# Altium PCB Linelance_PCB v1.2.PcbDoc
Units mm, origin at the board's own origin, x right, y up, seen from the top; angles counter-clockwise.
Board outline 33 x 79.6 mm, 2 copper layers (Top Layer, Bottom Layer), stack 1.672 mm thick; 71 components, 56 nets, 261 pads, 43 vias.
Unrouted connection lines stored in the file: 2.
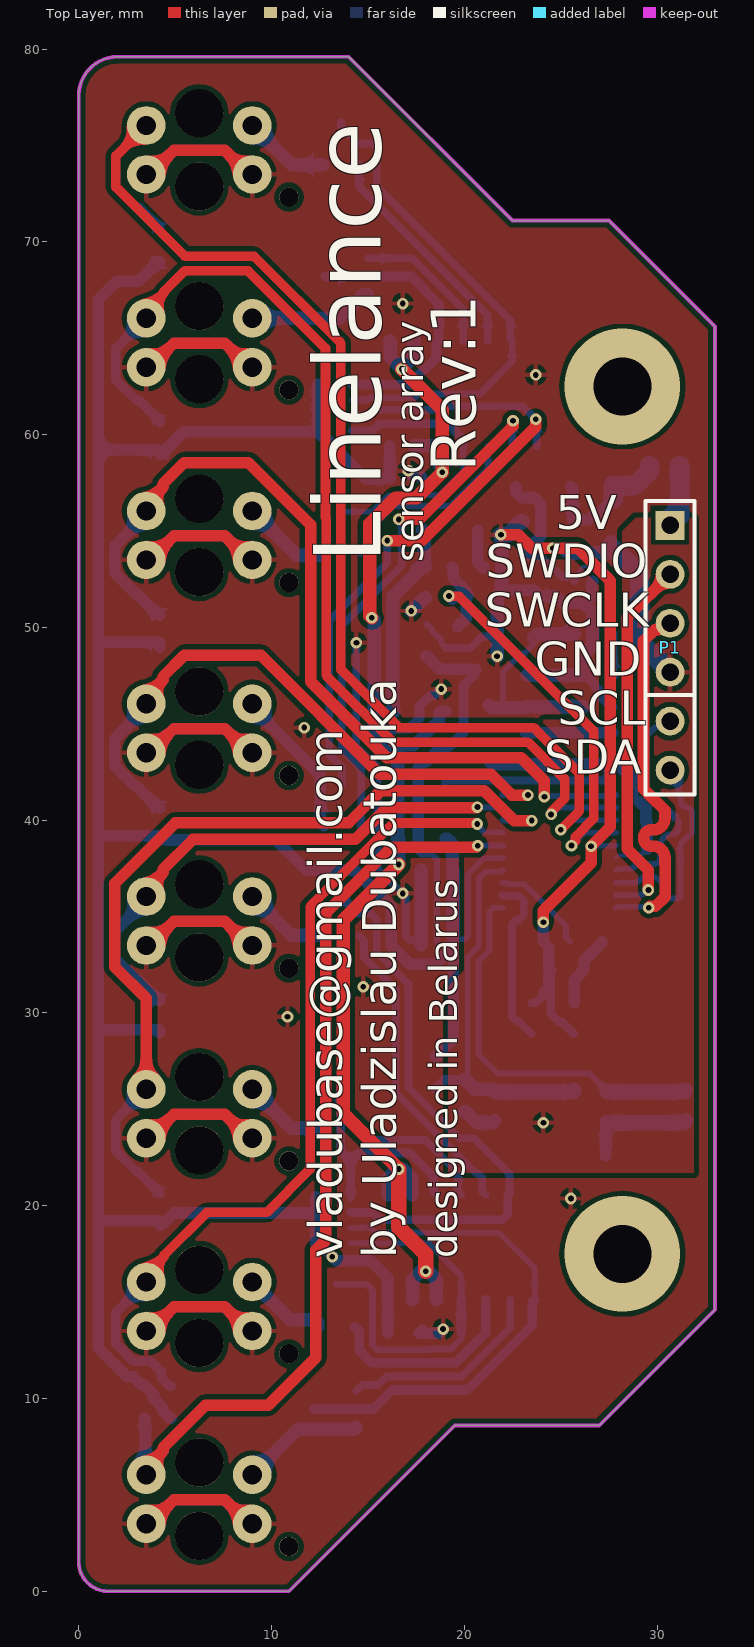
[diagram p0: Top Layer view]
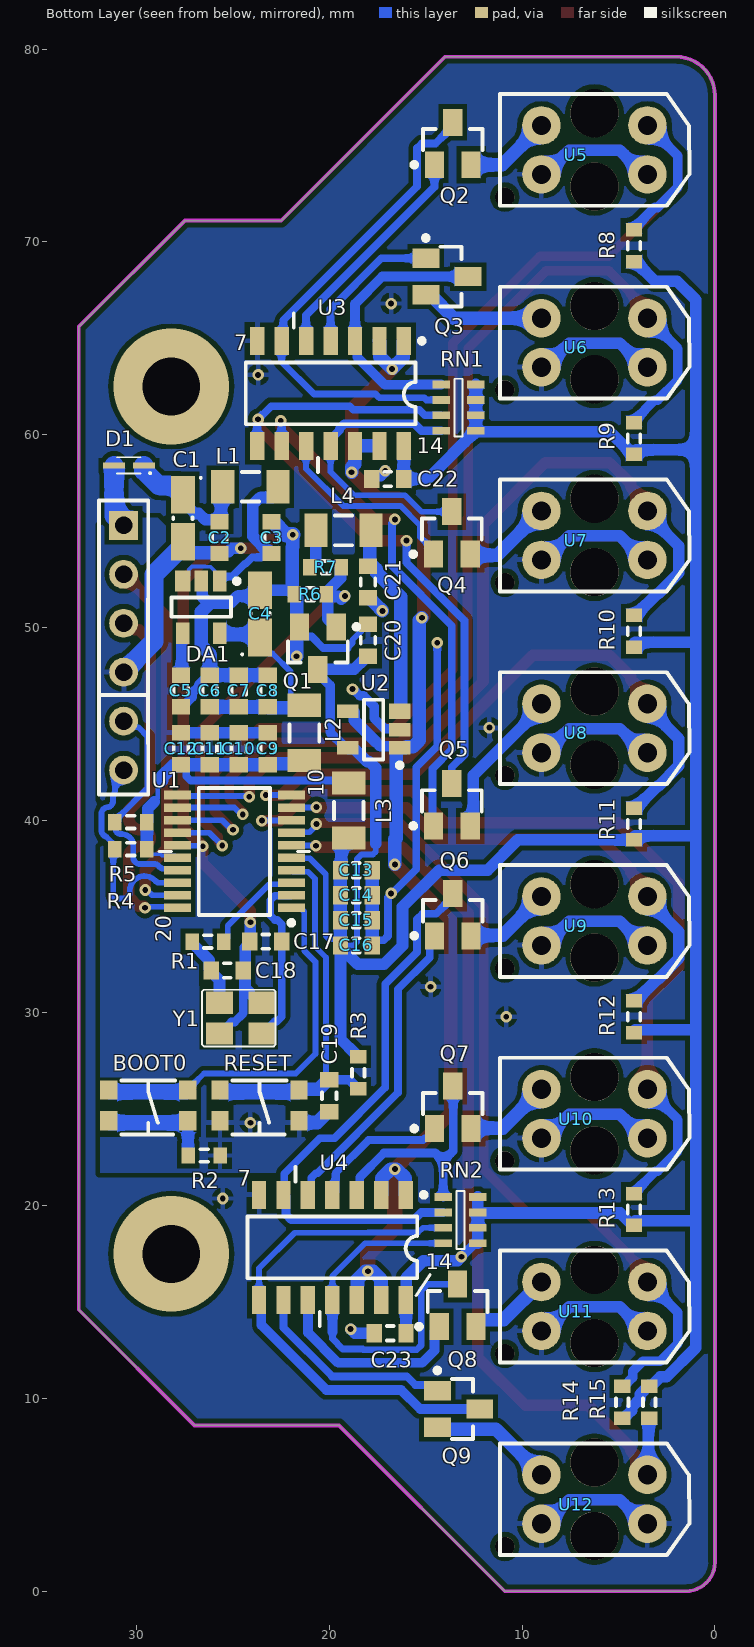
[diagram p1: Bottom Layer view, seen from below]
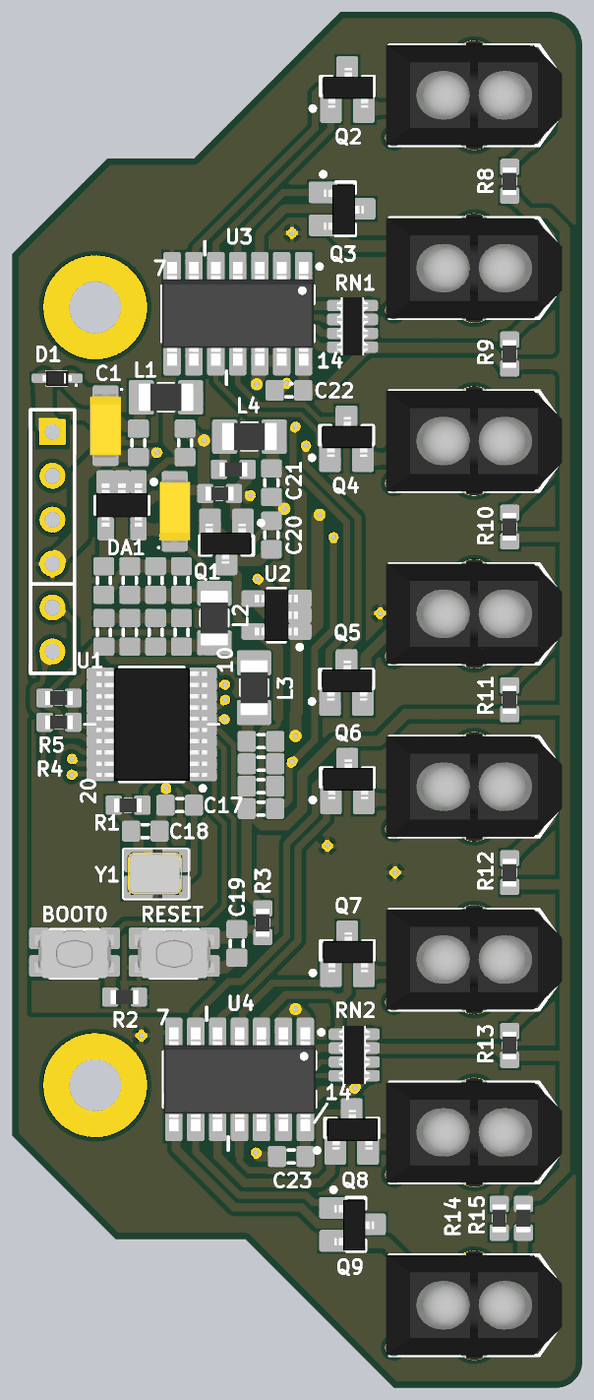
[diagram p2: 3D render of the assembled board from below, using the file's embedded part models]

## Layer stack, top to bottom
Top Solder: solder mask 0.01, Solder Resist, Dk 3.5
Top Layer: signal copper 0.036
Core: dielectric 1.6, FR-4, Dk 4.8
Bottom Layer: signal copper 0.036
Bottom Solder: solder mask 0.01, Solder Resist, Dk 3.5

## Board outline
0,1.5 ccw(c1.5,1.5) 1.5,0 10.9,0 19.5,8.6 27,8.6 33,14.6 33,65.6 27.5,71.1 22.5,71.1 14,79.6 2.007,79.6 ccw(c2.007,77.593) 0,77.593

## Design rules (kind name [scope] priority, off if disabled: settings)
Clearance [All] p1: gap=0.254 ignorepadtopadclearanceinfootprint=FALSE except(0: Arc-Hole Track-Hole SMDPad-Hole THPad-Hole Via-Hole Fill-Hole Poly-Hole Region-Hole Text-Hole; 0.127: SMDPad-SMDPad; 0.2: Arc-SMDPad Track-SMDPad; 0.33: Arc-THPad Track-THPad)
DiffPairsRouting [All] p1: maxlimit=0.254 minlimit=0.254 mostfreqgap=0.254 toplayer_minwidth=0.254 toplayer_maxwidth=0.381 toplayer_prefwidth=0.381 bottomlayer_minwidth=0.254 bottomlayer_maxwidth=0.381 bottomlayer_prefwidth=0.381 maxuncoupledlength=12.7
HoleSize [All] p1: absolutevalues=TRUE maxlimit=6.3 minlimit=0.3 maxpercent=80.000 minpercent=20.000
HoleToHoleClearance [All] p1: gap=0.54 allowstackedmicrovias=TRUE
PasteMaskExpansion [All] p1: expansion=0.13
PolygonConnect [All] p1: connectstyle=Relief reliefconductorwidth=0.254 reliefentries=4 polygonreliefangle="90 Angle" airgapwidth=0.254
RoutingCorners [All] p1: cornerstyle=Round minsetback=2.54 maxsetback=2.54
RoutingVias [All] p1: holewidth=0.3 width=0.6 viastyle="Through Hole" minholewidth=0.3 minwidth=0.6 maxholewidth=6.3 maxwidth=6.5
SilkToSolderMaskClearance [IsPad] p1: minsilkscreentomaskgap=0.15 clearancetoexposedcopper=TRUE
SolderMaskExpansion [All] p1: expansion=0.05 istentingtop=FALSE
Width [All] p1: maxlimit=2 minlimit=0.127 preferedwidth=0.3
24 further rules are at their usual default settings.

## Classes and differential pairs
component class Schematic_page3: C15 C22 C23 L4 Q1 Q2 Q3 Q4 Q5 Q6 Q7 Q8 Q9 R6 R15 U2 U3 U4 U5 U6 U7 U8 U9 U10 U11 U12
component class Schematic_page2: BOOT0 C23 R5 RESET U1
component class Schematic_page1: C1 C2 C3 C4 C5 C6 C7 C8 C15 C23 D1 D? DA1 DA? L1 L2 L3

## Components (designator, comment, footprint, x,y, rotation, side; value= is the part's Value field where it differs from the comment)
BOOT0 "Button" KMR221GLFS 31.9,23.8 r180 bottom (schematic designator SF1)
C1 "2.2 uF" TANT-A 27.6,55.657 r270 bottom
C2 "0.1 uF" C0603 25.7,54.657 r270 bottom
C3 "0.1 uF" C0603 23,54.657 r90 bottom
C4 "2.2 uF" TANT-A 23.6,50.7 r90 bottom
C5 "0.01 uF" C0603 27.7,46.7 r270 bottom
C6 "0.1 uF" C0603 26.2,46.7 r90 bottom
C7 "0.01 uF" C0603 24.7,46.7 r90 bottom
C8 "100 pF" C0603 23.2,46.7 r90 bottom
C9 "4.7 uF" C0603 23.2,43.7 r90 bottom value="100 pF" (schematic designator C13)
C10 "0.1 uF" C0603 24.7,43.7 r90 bottom (schematic designator C12)
C11 "0.01 uF" C0603 26.2,43.7 r90 bottom
C12 "100 pF" C0603 27.697,43.7 r90 bottom value="1 uF" (schematic designator C11)
C13 "1 uF" C0603 18.6,37.4 r180 bottom (schematic designator C14)
C14 "0.1 uF" C0603 18.6,36.1 r180 bottom value="0.01 uF" (schematic designator C15)
C15 "0.01 uF" C0603 18.6,34.8 r180 bottom
C16 "100 pF" C0603 18.6,33.5 r180 bottom
C17 "15 pF" C0603 23.3,33.7 r0 bottom (schematic designator C10)
C18 "15 pF" C0603 25.3,32.2 r180 bottom (schematic designator C9)
C19 "0.1 uF" C0603 20,25.7 r270 bottom (schematic designator C16)
C20 "0.1 uF" C0603 17.998,49.328 r90 bottom (schematic designator C17)
C21 "4.7 uF" C0603 17.997,52.353 r270 bottom (schematic designator C18)
C22 "0.1 uF" C0603 16.975,57.7 r0 bottom (schematic designator C19)
C23 "0.1 uF" C0603 16.85,13.375 r0 bottom (schematic designator C20)
D1 "PMEG2010AEB" SOD-523 30.4,58.4 r0 bottom
DA1 "TPS73033DBVR" SOT-23-5 26.651,51.053 r270 bottom
L1 "120R@100MHz" IND1206 24.1,57.3 r180 bottom
L2 "120R@100MHz" IND1206 21.298,44.528 r270 bottom
L3 "120R@100MHz" IND1206 19,40.5 r270 bottom
L4 "100 uH" IND1206 19.268,55.028 r180 bottom
P1 "Header 6" HDR1X6 30.675,55.295 r270 top
Q1 "2N7002" SOT-23-3 20.598,48.928 r270 bottom
Q2 "MMBFJ201" SOT-23-3 13.6,75.1 r90 bottom
Q3 "MMBFJ201" SOT-23-3 13.9,68.2 r180 bottom
Q4 "MMBFJ201" SOT-23-3 13.65,54.9 r90 bottom
Q5 "MMBFJ201" SOT-23-3 13.65,40.8 r90 bottom
Q6 "MMBFJ201" SOT-23-3 13.6,35.1 r90 bottom
Q7 "MMBFJ201" SOT-23-3 13.6,25.1 r90 bottom
Q8 "MMBFJ201" SOT-23-3 13.35,14.825 r90 bottom
Q9 "MMBFJ201" SOT-23-3 13.3,9.45 r180 bottom
R1 "430 1%" R0603 26.3,33.7 r180 bottom
R2 "10 k" R0603 26.5,22.6 r0 bottom
R3 "10 k" R0603 18.5,26.9 r270 bottom
R4 "10 k" R0603 30.3,38.5 r0 bottom
R5 "10 k" R0603 30.3,39.9 r0 bottom
R6 "10 k" R0603 20.998,51.728 r0 bottom
R7 "10 k" R0603 20.198,53.128 r180 bottom
R8 "200 R" R0603 4.2,69.8 r270 bottom
R9 "200 R" R0603 4.2,59.8 r270 bottom
R10 "200 R" R0603 4.2,49.8 r270 bottom
R11 "200 R" R0603 4.2,39.8 r270 bottom
R12 "200 R" R0603 4.2,29.8 r270 bottom
R13 "200 R" R0603 4.2,19.8 r270 bottom
R14 "200 R" R0603 4.8,9.8 r270 bottom
R15 "200 R" R0603 3.4,9.8 r90 bottom
RESET "Button" KMR221GLFS 26.125,23.8 r180 bottom (schematic designator SF2)
RN1 "2.2 k" RN_YC164-JR-072K2L 13.3,61.4 r0 bottom
RN2 "2.2 k" RN_YC164-JR-072K2L 13.2,19.25 r0 bottom
U1 "STM32F030F4P6" TSSOP-20 24.925,38.375 r0 bottom
U2 "AD8601WDRTZ-REEL7" SOT-23-5 17.7,44.7 r0 bottom
U3 "LM3900" SOIC-14 19.941,62.135 r270 bottom
U4 "LM3900" SOIC-14 19.841,17.835 r270 bottom
U5 "TCRT5000" TCRT5000 6.25,74.77 r270 bottom
U6 "TCRT5000" TCRT5000 6.25,64.77 r270 bottom
U7 "TCRT5000" TCRT5000 6.25,54.77 r270 bottom
U8 "TCRT5000" TCRT5000 6.25,44.77 r270 bottom
U9 "TCRT5000" TCRT5000 6.25,34.77 r270 bottom
U10 "TCRT5000" TCRT5000 6.25,24.77 r270 bottom
U11 "TCRT5000" TCRT5000 6.25,14.77 r270 bottom
U12 "TCRT5000" TCRT5000 6.25,4.77 r270 bottom
Y1 "24.0000MHZ" TSX-3225 24.7,29.7 r0 bottom

## Footprints (in the part's own frame and the unit in brackets; to place one, negate y for a bottom-side part, rotate by r counter-clockwise, add the part's x,y. Pads: shape width x height; smd on the part's side, far side on the other; paste and mask are expansions set on the pad)
C0603 [mm]
  rect 0.8x0.95 smd: 1(-0.825,0) 2(0.825,0)
  silkscreen extent -0.18,-0.38 0.18,0.38, body extent -0.8,-0.4 0.8,0.4, height 0.5
HDR1X6 [mm] "Connector; Header; 6 Position"
  rect 1.5x1.5 hole 0.9: 1(0,0)
  round 1.5 hole 0.9: 2(2.54,0) 3(5.08,0) 4(7.62,0) 5(10.16,0) 6(12.7,0)
  silkscreen extent -1.27,-1.27 13.97,1.27
IND1206 [mm]
  rect 1.2x1.74 smd: 1(-1.43,0) 2(1.43,0)
  silkscreen extent -0.45,-0.77 0.45,0.77, body extent -1.6,-0.8 1.6,0.8, height 1.8
KMR221GLFS [mm]
  rect 0.9x1 smd mask+0.102: 1(4.55,2.2)
  rect 0.9x1 smd: 2(0.45,2.2) 3(0.45,0.6) 4(4.55,0.6)
  silkscreen extent 1.1,-0.1 3.9,2.7, body extent 0.2,-0.1 4.8,2.7, height 1.92
R0603 [mm]
  rect 0.7x0.85 smd: 1(-0.825,0) 2(0.825,0)
  silkscreen extent -0.2,-0.33 0.2,0.33, body extent -0.8,-0.4 0.8,0.4, height 0.5
RN_YC164-JR-072K2L [mm] "Chip Array, ConvexE, 8-Leads, Pitch 0,80mm,  Body 3,20x1,60mm,  IPC Medium Density"
  rect 0.9x0.4 smd: 1(-0.9,1.2) 2(-0.9,0.4) 3(-0.9,-0.4) 4(-0.9,-1.2) 5(0.9,-1.2) 6(0.9,-0.4) 7(0.9,0.4) 8(0.9,1.2)
  silkscreen extent -0.2,-1.5 0.2,1.5, body extent -0.92,-1.68 0.92,1.68, height 0.7
SOD-523 [mm]
  rect 1.15x0.3 smd: 1(-0.775,0) 2(0.775,0)
  silkscreen extent -1.15,-0.43 0.63,0.45, body extent -0.85,-0.45 0.85,0.45, height 0.7
SOIC-14 [mm] "SOIC, 14-Leads, Body 7,15x3,90mm, Pitch 1,27mm, IPC Medium Density"
  rect 1.45x0.75 smd: 1(-2.725,3.81) 2(-2.725,2.54) 3(-2.725,1.27) 4(-2.725,0) 5(-2.725,-1.27) 6(-2.725,-2.54) 7(-2.725,-3.81) 8(2.725,-3.81) 9(2.725,-2.54) 10(2.725,-1.27) 11(2.725,0) 12(2.725,1.27) 13(2.725,2.54) 14(2.725,3.81)
  silkscreen extent -2.85,-4.4 1.6,4.86, body extent -3,-4.4 3,4.4, height 1.75
SOT-23-3 [mm]
  rect 1.4x1 smd: 1(-1.1,0.95) 2(-1.1,-0.95) 3(1.1,0)
  silkscreen extent -1.22,-1.55 0.75,2.12, body extent -1.05,-1.5 1.25,1.4, height 1
SOT-23-5 [mm] "SOT23, 5-Leads, Body 2,90x2,80mm, Pitch 0,95mm, IPC High Density"
  rect 1.1x0.7 smd: 1(-1.347,0.951) 2(-1.347,0.001) 4(1.353,-0.949) 5(1.353,0.951)
  rect 1.1x0.8 smd: 3(-1.347,-0.949)
  silkscreen extent -1.47,-1.55 0.5,1.98, body extent -1.25,-1.5 1.25,1.5, height 1.09
TANT-A [mm]
  rect 1.95x1.25 smd: 1(-1.225,0) 2(1.225,0)
  silkscreen extent -2.15,0.87 -2.05,0.97, body extent -2.39,-0.9 2.41,0.9, height 1.8
TCRT5000 [mm]
  round 2 hole 1: 1(-1.27,2.75) 2(1.27,2.75) 3(1.27,-2.75) 4(-1.27,-2.75)
  round 2.5 hole 2.5: 5(-1.9,0) 7(1.9,0)
  round 1 hole 1: 6(2.45,-4.65)
  silkscreen extent -2.9,-4.9 2.9,4.92, body extent -3.5,-5.1 3.5,5.1, height 7.02
TSSOP-20 [mm]
  rect 1.4x0.45 smd: 1(-2.95,2.925) 2(-2.95,2.275) 3(-2.95,1.625) 4(-2.95,0.975) 5(-2.95,0.325) 6(-2.95,-0.325) 7(-2.95,-0.975) 8(-2.95,-1.625) 9(-2.95,-2.275) 10(-2.95,-2.925) 11(2.95,-2.925) 12(2.95,-2.275) 13(2.95,-1.625) 14(2.95,-0.975) 15(2.95,-0.325) 16(2.95,0.325) 17(2.95,0.975) 18(2.95,1.625) 19(2.95,2.275) 20(2.95,2.925)
  silkscreen extent -3.07,-3.3 1.85,3.82, body extent -3.2,-3.25 3.2,3.25, height 1.1
TSX-3225 [mm] "Crystal"
  rect 1.4x1.15 smd: 1(-1.2,0.775) 2(1,0.775) 3(1,-0.825) 4(-1.2,-0.825)
  silkscreen extent -1.9,-1.5 1.9,1.45, body extent -1.55,-1.3 1.65,1.2, height 0.6

## Part data
BOOT0 RESET: "SWITCH TACTILE SPST-NO 0.05A 32V", Case=KMR221GLFS, Manufacturer=C&K, HelpURL=https://www.digikey.com/product-detail/en/c-k/KMR221GLFS/401-1427-1-ND/550466, Model=KMR221GLFS
C1: library part Capasitor_Tantalum, Case="SMD A", Manufacturer=-, HelpURL=https://www.chipdip.by/product0/12712, Model=-
C2 C3 C6 C7 C8 C9 C10 C12 C13 C14 C17 C18 C19 C20 C21 C22 C23: library part Capasitor, Case=С0603, Manufacturer="Murata Manufacturing"
  C2 C3 C6 C10 C19 C20 C22 C23: HelpURL=https://www.chipdip.by/product/grm188r71h104k, Model="X7R 10% 50V"
  C7: HelpURL=https://www.chipdip.by/product/grm188r71h103k, Model="X7R 10% 50V"
  C8 C9: HelpURL=https://www.chipdip.by/product/grm1885c1h101j, Model="NP0 5% 50V"
  C12 C13: HelpURL=https://www.chipdip.by/product/grm188r61c105k, Model="X5R 10% 16V"
  C14: HelpURL=https://www.chipdip.by/product0/9000143994, Model="X7R 10% 50V"
  C17 C18: HelpURL=https://www.chipdip.by/product/grm1885c2a150j, Model="NP0 5% 100V"
  C21: HelpURL=https://www.chipdip.by/product0/9000193550, Model="X5R 10% 10V"
C4: library part Capasitor_Tantalum, Case="SMD A", HelpURL=https://www.chipdip.by/product0/12712
C5: library part Capasitor, Case=C0603, Manufacturer="Murata Manufacturing", HelpURL=https://www.chipdip.by/product/grm188r71h103k, Model="X7R 10% 50V"
D1: library part "Diode Schottky", "Schottky Barrier Diodes, 1A to 1.5A, Nexperia", Case=SOD-523, Manufacturer=Nexperia, HelpURL=https://www.chipdip.by/product/pmeg2010aeb.115, Model=PMEG2010AEB
DA1: library part TPS73033DBV, "IC REG LINEAR 3.3V 200MA SOT 23-5", Case=SOT-23-5, Manufacturer="Texas Instruments", HelpURL=https://www.digikey.com/product-detail/en/texas-instruments/TPS73033DBVR/296-17580-1-ND/705377, Model=TPS73033DBVR
L1 L2 L3: library part Inductivity
L4: library part Inductivity, Case=IND1206, Manufacturer="Murata Manufacturing", HelpURL=https://www.chipdip.by/product/lqh31cn101k03l
P1: "Header, 6-Pin", LatestRevisionDate=17-Jul-2002, LatestRevisionNote="Re-released for DXP Platform.", Publisher="Altium Limited"
Q1: "MOSFET N-Channel 60V 115mA (Ta) 200mW (Ta) Surface Mount SOT-23 (TO-236AB)", Case=SOT-23-3, Manufacturer=Vishay, HelpURL=https://www.chipdip.by/product/2n7002k-t1-ge3-3, Model="MOSFET N-CH 60V 115MA SOT-23"
Q2 Q3 Q4 Q5 Q6 Q7 Q8 Q9: "JFET N-Channel 40V 350mW Surface Mount SOT-23-3", Case=SOT-23-3, HelpURL=https://www.chipdip.by/product/mmbfj201, Manifacturer="ON Semiconductor", Model=MMBFJ201
R1: library part Resistor, "Rext.", Case=R0603, Manufacturer=-, HelpURL=https://www.chipdip.by/product0/9000079667, Model=-
R2 R3 R4 R5 R6 R7: library part Resistor, Case=R0603, Manufacturer=YAGEO, HelpURL=https://belchip.by/product/?selected_product=30985
R8 R9 R10 R11 R12 R13 R14 R15: library part Resistor
U1: "IC MCU 32BIT 16KB FLASH 20TSSOP", Case=TSSOP-20, Manufacturer=STMicroelectronics, HelpURL=https://www.chipdip.by/product/stm32f030f4p6, Model=STM32F030F4P6TR
U2: library part AD8601, "IC OPAMP GP 1 CIRCUIT SOT23-5", Case=SOT-23-5, Manufacturer="Analog Devices Inc.", HelpURL=https://www.chipdip.by/product/ad8601artz-reel7, Model=AD8601WDRTZ-REEL7
U3 U4: "IC OPAMP GP 4 CIRCUIT 14SOIC", Case=SOIC-14, Manufacturer="Texas Instruments", HelpURL=https://www.chipdip.by/product/lm3900d, Model=LM3900D
U5 U6 U7 U8 U9 U10 U11 U12: "SENSOR OPTO TRANS 15MM REFL PCB", Manufacturer="Vishay Semiconductor Opto Division", Case=TCRT5000, HelpURL=https://www.digikey.com/product-detail/en/vishay-semiconductor-opto-division/TCRT5000/751-1033-5-ND/1681167, Model=TCRT5000
Y1: library part Crystal, "CRYSTAL 24.0000MHZ 9PF SMD", Case=TSX-3225, Manufacturer=EPSON, HelpURL=https://www.digikey.com/product-detail/en/epson/TSX-3225-24-0000MF20G-AC0/SER4185TR-ND/2819192, Model="TSX-3225 24.0000MF20G-AC0"

## Via types
v1: diameter 0.6, hole 0.3, Top Layer to Bottom Layer, 41 vias
v2: diameter 6, hole 3, Top Layer to Bottom Layer, 2 vias

## Nets (pads, with @x,y where several pads share a name; then routed paths per layer and width w, separated by ;. In a path a pad name is that pad's centre, name@x,y a point inside that pad or via, vN(x,y) a via of type N, cw(c..) or ccw(c..) an arc to the next point about the centre after c; other vN are vias at no path point)
AGND: C3.2 C4.2 C5.2 C6.2 C7.2 C8.2 C13.2 C14.2 C15.2 C16.2 C20.2 C21.2 C22.2 C23.2 DA1.2 Q1.2 R6.2 U2.2 U3.7 U4.7 U5.2 U5.3 U6.2 U6.3 U7.2 U7.3 U8.2 U8.3 U9.2 U9.3 U10.2 U10.3 U11.2 U11.3 U12.2 U12.3 | length 163.4
  Top Layer w0.6: U12.2 3.687,3.5 4.937,4.75 7.563,4.75 8.813,3.5 U12.3 ; U11.2 3.687,13.5 4.937,14.75 7.563,14.75 8.813,13.5 U11.3 ; U10.2 3.687,23.5 4.937,24.75 7.563,24.75 8.813,23.5 U10.3 ; U9.2 3.687,33.5 4.937,34.75 7.563,34.75 8.813,33.5 U9.3 ; U8.2 3.687,43.5 4.937,44.75 7.563,44.75 8.813,43.5 U8.3 ; U7.2 3.687,53.5 4.937,54.75 7.563,54.75 8.813,53.5 U7.3 ; U6.2 3.687,63.5 4.937,64.75 7.563,64.75 8.813,63.5 U6.3 ; U5.2 3.687,73.5 4.937,74.75 7.563,74.75 8.813,73.5 U5.3 ; v1(21.9,54.8) 22.8,54.8 23.5,54.1 23.746,54.1
  Bottom Layer w0.3: C20.2 18.073,50.153 18.323,49.903 18.323,49.828 18.797,49.353 18.797,49.183 19.053,48.928
  Bottom Layer w0.4: v1(14.4,49.2) 14.4,43.841 15.5,42.741 15.5,37.446 16.8,36.146 16.961,35.985 16.961,33.989 17.175,33.775 17.575,33.775 17.775,33.575 17.775,33.534 C16.2 ; 19.053,48.928 20.313,48.928 20.913,49.528 21.247,49.528 21.547,49.828 Q1.2
  Bottom Layer w0.5: U2.2 16.399,44.745 17.135,44.745 17.676,45.286 17.676,45.908 18.221,46.453 18.426,46.453 18.773,46.8 v1(18.8,46.8) ; C23.2 17.675,13.45 C23.2@17.825,13.6 ; C8.2 C8.2@23.275,47.525 ; C6.2 26.275,47.525 26.775,47.025 26.775,46.939 27.125,46.589 27.125,46.375 27.625,45.875 C5.2
  Bottom Layer w0.6: U12.2 3.687,3.5 4.937,4.75 7.563,4.75 8.813,3.5 U12.3 ; U11.2 3.687,13.5 4.937,14.75 7.563,14.75 8.813,13.5 U11.3 ; U10.2 3.687,23.5 4.937,24.75 7.563,24.75 8.813,23.5 U10.3 ; U9.2 3.687,33.5 4.937,34.75 7.563,34.75 8.813,33.5 U9.3 ; U8.2 3.687,43.5 4.937,44.75 7.563,44.75 8.813,43.5 U8.3 ; U7.2 3.687,53.5 4.937,54.75 7.563,54.75 8.813,53.5 U7.3 ; U6.2 3.687,63.5 4.937,64.75 7.563,64.75 8.813,63.5 U6.3 ; U5.2 3.687,73.5 4.937,74.75 7.563,74.75 8.813,73.5 U5.3 ; v1(17.104,58.131) 17.104,58.096 17.325,57.875 17.7,57.875 17.8,57.775 C22.2 ; C23.2 18.675,13.375 v1(18.9,13.6) ; 21.879,52.272 21.873,52.265 21.873,51.778 R6.2 21.857,51.728 22.055,51.925 C4.2 23.906,51.619 24.774,51.619 25.143,51.25 26.257,51.25 26.6,51.593 26.6,52.35 DA1.2
  Bottom Layer w0.7: v1(17.247,50.853) 17.627,51.233 17.872,51.478 17.947,51.478 C21.2 ; C16.2@17.775,33.534 C15.2 C14.2 17.775,36.225 C13.2 ; v1(21.7,48.5) 21.697,48.503 21.697,49.878 Q1.2 21.634,50.028 21.697,50.091 21.697,51.537 21.7,51.54 21.71,51.54 21.823,51.653 R6.2 ; v1(21.9,54.8) 21.9,54.186 21.929,54.157 21.929,52.272 21.925,52.268 ; C8.2@23.275,47.525 C7.2 C6.2 26.2,48.622 26.654,49.076 26.654,50.803 26.257,51.2
  Bottom Layer w0.8: v1(21.9,54.8) 22.243,54.8 22.925,55.482 C3.2
  other v1: 25.528,20.374 10.825,29.8 14.752,31.354 16.8,36.2 11.7,44.8 23.7,63.1 16.8,66.8
AVCC_3V3: C13.1 C14.1 C15.1 C16.1 C20.1 C22.1 C23.1 L3.2 Q1.3 R3.1 R8.2 R9.2 R10.2 R11.2 R12.2 R13.2 R14.2 R15.2 RN1.1 RN1.2 RN1.3 RN1.4 RN2.1 RN2.2 RN2.3 RN2.4 U1.5 U2.5 U3.14 U4.14 | length 173.7
  Bottom Layer w0.3: 17.6,38.782 17.6,38.364 17.739,38.225 18.32,38.225 18.575,37.97 18.575,33.676 18.751,33.5 C16.1 19.425,33.57 19.675,33.82 20.016,33.82 20.192,33.996 20.192,37.192 21.021,38.021 21.946,38.021 U1.5 ; C15.1 C15.1@19.425,34.875
  Bottom Layer w0.5: RN2.1@12.45,18.05 v1@13.14,17.36 ; U2.5 19.153,43.849 19.253,43.849 19.96,44.556 19.96,46.99 20.598,47.628 Q1.3
  Bottom Layer w0.6: 1,49.05 1,39.2 ; R15.2 3.425,10.65 R15.2@3.425,10.675 ; R12.2 4.2,29.011 4.186,29.025 4.186,29.068 4.139,29.115 1,29.115 ; R10.2 4.2,49.011 4.186,49.025 4.186,49.193 4.139,49.24 1,49.24 1,59.216 ; R8.2 4.125,68.975 3.109,67.959 1.966,67.959 1,66.993 1,59.216 ; R14.2 4.725,8.975 4.325,9.375 4.325,9.532 3.875,9.982 3.875,10.225 R15.2@3.425,10.675 ; RN1.1@12.2,60.15 5.45,60.15 4.275,58.975 R9.2 4.192,58.983 4.192,59.103 4.079,59.216 1,59.216 ; 12.3,19.975 RN2.4 ; RN1.4 RN1.3 RN1.2 RN1.1 14.9,57.7 C22.1 16.141,57.709 16.141,59.401 U3.14 ; RN2.1@12.45,18.05 RN2.1 RN2.2 RN2.3 12.27,19.62 4.92,19.62 4.275,18.975 R13.2 4.2,19.011 4.186,19.025 4.186,19.168 4.139,19.215 1,19.215 ; v1(13.15,17.35) 13.35,17.15 15.129,17.15 16.014,16.265 16.014,15.128 U4.14 16.028,15.107 16.028,13.378 C23.1 ; 17.6,38.782 17.6,42.707 17.923,43.03 18.034,43.03 18.703,43.699 19.003,43.699 U2.5 ; C20.1 18.073,48.503 18.173,48.403 18.173,48.377 18.722,47.828 Q1.3 ; R3.1 18.575,27.725 18.625,27.775 18.625,27.85 19.425,28.65 C16.1 19.325,33.4 19.325,33.325 18.525,32.525 17.168,32.525 16.207,33.486 16.207,35.5 14.307,37.4 13.4,37.4 13.39,37.41 11.79,37.41 10.225,38.975 R11.2 4.2,39.011 4.186,39.025 4.186,39.143 4.129,39.2 1,39.2 ; L3.2 19.125,39.07 19.375,38.82 19.375,37.45 C13.1 ; C15.1@19.425,34.675 C15.1 ; 1,19.215 1,29.115 ; 1,19.215 1,12.629 2.513,11.116 2.834,11.116 3.275,10.675 R15.2@3.425,10.675 ; 1,29.115 1,39.2
  Bottom Layer w0.7: C16.1@19.425,33.825 C15.1@19.425,34.675 ; C15.1@19.425,34.875 C14.1 C13.1
BOOT0: BOOT0.1 BOOT0.2 U1.1 | length 19.9
  Bottom Layer w0.3: U1.1 21.5,35.45 21.3,35.25 21.3,33.222 20.728,32.649 20.728,27.872 21.75,26.85 26.5,26.85 27.05,26.3 27.05,26.25 27.3,26 BOOT0.1
  Bottom Layer w0.8: BOOT0.1@27.4,25.9 31.4,25.9 31.45,25.95 BOOT0.2
GND: C1.2 C2.2 C9.2 C10.2 C11.2 C12.2 C19.2 P1.4 R2.1 RESET.3 RESET.4 U1.15 | length 36.9
  Top Layer w0.6: v1(24.6,54.1) 25.9,54.1 27.575,52.425 27.575,39.647 v1(26.574,38.646)
  Bottom Layer w0.3: v1(26.574,38.646) 26.601,38.673 27.848,38.673 U1.15
  Bottom Layer w0.6: C9.2 C10.2 C11.2 C12.2 ; v1(24.6,54.1) 25.058,54.1 25.226,53.932 25.6,53.932 C2.2
  Bottom Layer w0.7: C19.2 20.075,24.875 20.641,24.309 21.484,24.309 RESET.4 ; C2.2 25.75,53.882 27.325,53.882 27.6,54.157 C1.2
  Bottom Layer w1: C1.2@27.6,54.157 27.6,54.082 27.725,53.957 27.883,53.957 29.095,52.745 29.095,49.277 30.675,47.697 P1.4
  other v1: 24.1,24.3
NetC1_1: C1.1 C2.1 D1.1 L1.1 | length 7.8
  Bottom Layer w0.6: L1.1 25.615,57.215 25.615,55.567 C2.1 25.8,55.582 26.443,55.582 26.768,55.907 26.975,55.907 27.6,56.532 C1.1
  Bottom Layer w1: C1.1@27.725,56.65 27.725,57.357 28.857,57.357 29.625,58.125 D1.1
NetC3_1: C3.1 DA1.1 DA1.3 L1.2 | length 11
  Bottom Layer w0.18: 26.158,53.132 26.168,53.142 26.295,53.142 26.306,53.153 26.454,53.153
  Bottom Layer w0.2: DA1.1 25.95,52.65 25.95,52.924 26.158,53.132 ; 26.454,53.153 26.457,53.15 27.124,53.15 27.3,52.974 27.3,52.7 DA1.3
  Bottom Layer w0.4: C3.1 23.2,53.632 24.001,53.632 24.334,53.3 24.391,53.3 25.041,52.65 25.55,52.65 25.7,52.5 DA1.1
  Bottom Layer w0.6: L1.2 22.67,57.03 22.97,56.73 23.624,56.73 23.975,56.379 23.975,54.732 23.175,53.932 23.1,53.932 C3.1
NetC5_1: C5.1 DA1.4 | length 2.2
  Bottom Layer w0.6: DA1.4 27.65,49.65 27.65,47.575 C5.1
NetC9_1: C18.1 R1.1 Y1.3 | length 3.8
  Bottom Layer w0.6: Y1.3 25.7,31.7 26.125,32.125 C18.1 26.225,32.3 26.225,32.725 27.125,33.625 R1.1
NetC18_1: C21.1 L4.2 U2.3 | length 10.4
  Bottom Layer w0.7: U2.3 16.343,45.649 16.293,45.699 16.293,51.593 17.558,52.858 17.558,53.009 17.676,53.128 17.947,53.128 C21.1 17.968,53.178 17.918,53.228 17.918,54.948 L4.2
NetL4_1: L4.1 R7.1 | length 2.1
  Bottom Layer w0.6: L4.1 20.7,55.025 20.7,53.348 20.972,53.075 R7.1 R7.1
NetQ2_2: Q2.2 U5.4 | length 4.5
  Bottom Layer w0.7: U5.4 11.04,74 Q2.2
NetQ3_2: Q3.2 U6.4 | length 6.5
  Bottom Layer w0.7: U6.4 13.544,66.04 14.754,67.25 Q3.2
NetQ4_2: Q4.2 U7.4 | length 4.7
  Bottom Layer w0.7: U7.4 11.3,53.74 12.55,53.74 12.61,53.8 Q4.2
NetQ5_2: Q5.2 U8.4 | length 7.9
  Bottom Layer w0.6: U8.4 9,45.85 12.528,42.322 12.528,39.872 Q5.2
NetQ6_2: Q6.2 U9.4 | length 4.5
  Bottom Layer w0.7: U9.4 11.015,34.025 12.625,34.025 Q6.2
NetQ7_2: Q7.2 U10.4 | length 4.5
  Bottom Layer w0.7: U10.4 11.015,24.025 12.625,24.025 Q7.2
NetQ8_2: Q8.2 U11.4 | length 4.5
  Bottom Layer w0.7: U11.4 10.965,14.075 12.25,14.075 12.4,13.925 Q8.2
NetQ9_2: Q9.2 U12.4 | length 6.4
  Bottom Layer w0.7: U12.4 11.36,8.4 14.3,8.4 Q9.2
NetR2_2: BOOT0.3 BOOT0.4 R2.2 | length 6
  Bottom Layer w0.6: R2.2 27.337,22.612 27.337,24.285 27.324,24.299 27.387,24.362 BOOT0.4
  Bottom Layer w0.8: BOOT0.4@27.4,24.3 31.4,24.3 31.45,24.35 BOOT0.3
NRST: C19.1 R3.2 RESET.1 RESET.2 U1.4 | length 19.9
  Bottom Layer w0.3: C19.1 20.174,26.699 20.174,32.879 20.746,33.451 20.746,36.963 21.108,37.325 21.9,37.325 U1.4 ; RESET.1@21.575,25.95 RESET.1
  Bottom Layer w0.5: R3.2 18.575,26.075 18.675,26.175 18.675,26.232 18.968,26.525 C19.1
  Bottom Layer w0.7: C19.1 20.05,26.475 20.125,26.475 20.55,26.05 21.475,26.05 RESET.1@21.575,25.95
  Bottom Layer w0.8: RESET.1@21.575,25.95 21.625,25.9 25.625,25.9 25.675,25.95 RESET.2
OSC_GND: C17.2 C18.2 Y1.2 Y1.4 | length 12.4
  Top Layer w0.6: v1(24.1,34.7) 24.1,35.3 26.587,37.787
  Bottom Layer w0.45: Y1.4 23.725,30.525 24.075,30.875 24.075,31.1 24.3,31.325 24.3,32.025 C18.2 24.475,29.974 24.924,29.525 25.075,29.525 25.675,28.925 Y1.2
  Bottom Layer w0.6: v1(24.1,34.7) 24.1,33.725 C17.2 ; C17.2@24.375,33.375 24.375,32.3 C18.2
OSC_IN: C17.1 U1.2 Y1.1 | length 9
  Bottom Layer w0.4: U1.2 22,36.075 22.841,36.075 23.075,35.841 23.075,35.059 22.841,34.825 22.709,34.825 22.475,34.591 C17.1 22.475,29.809 22.734,29.55 22.85,29.55 23.475,28.925 Y1.1
OSC_OUT: R1.2 U1.3 | length 5.1
  Bottom Layer w0.3: U1.3 22.179,36.75 22.25,36.679 23.121,36.679 25.275,34.525 25.275,33.9 R1.2
PA0: R15.1 U1.6 U12.1 | length 48.6
  Top Layer w0.6: U12.1 3.5,6.419 4.37,7.289 4.37,7.449 6.572,9.65 9.828,9.65 12.296,12.118 12.296,17.704 12.804,18.212 12.804,35.182 16.226,38.604 20.629,38.604 v1(20.7,38.675)
  Bottom Layer w0.3: v1(20.7,38.675) 20.713,38.687 21.962,38.687 U1.6 U1.6@22.025,38.65
  Bottom Layer w0.6: R15.1 3.45,8.925 3.45,6.09 U12.1
PA1: R14.1 U1.7 U11.1 | length 44.7
  Top Layer w0.5: U11.1 3.5,16.446 4.42,17.366 4.42,17.428 6.642,19.65 9.758,19.65 12,21.893 12,35.515 16.335,39.85 20.598,39.85 20.648,39.8 v1(20.675,39.8)
  Bottom Layer w0.3: v1(20.675,39.8) 20.675,39.731 21.035,39.371 21.954,39.371 U1.7
  Bottom Layer w0.5: U11.1 1.92,14.46 1.92,12.846 2.846,11.92 3.75,11.92 4.269,11.401 4.269,11.082 4.725,10.625 R14.1
PA2: R13.1 U1.8 U10.1 | length 44.2
  Top Layer w0.6: U10.1 3.5,30.752 1.87,32.382 1.87,36.715 5.009,39.854 13.994,39.854 15.671,41.531 21.03,41.531 22.586,39.975 v1(23.5,39.975)
  Bottom Layer w0.3: U1.8 21.988,39.987 23.487,39.987 v1(23.5,39.975)
  Bottom Layer w0.5: U10.1 1.92,24.46 1.92,22.846 2.98,21.785 3.082,21.785 4.143,20.725 4.143,20.682 R13.1
PA3: R12.1 U1.9 U9.1 | length 27.9
  Top Layer w0.6: U9.1 3.5,36.419 4.37,37.289 4.37,37.449 5.921,39 14.347,39 16.001,40.654 20.653,40.654 v1(20.676,40.677)
  Bottom Layer w0.3: v1(20.676,40.677) 20.703,40.65 U1.9
  Bottom Layer w0.6: U9.1 3.5,35.85 1.87,34.22 1.87,32.825 2.945,31.75 3,31.75 4.075,30.675 4.15,30.675 R12.1
PA4: R11.1 U1.10 U8.1 | length 32.6
  Top Layer w0.6: U8.1 3.5,46.419 4.37,47.289 4.37,47.449 5.471,48.55 9.45,48.55 15.615,42.385 21.384,42.385 22.469,41.3 v1(23.3,41.3)
  Bottom Layer w0.3: U1.10 v1(23.3,41.3)
  Bottom Layer w0.6: U8.1 3.5,45.85 1.87,44.22 1.87,42.825 2.945,41.75 3,41.75 4.075,40.675 4.15,40.675 R11.1
PA5: R10.1 U1.11 U7.1 | length 45.3
  Top Layer w0.6: U7.1 3.5,56.419 4.37,57.289 4.37,57.449 5.471,58.55 8.795,58.55 12.03,55.315 12.03,47.178 15.969,43.239 22.961,43.239 24.154,42.046 v1(24.154,41.218)
  Bottom Layer w0.3: v1(24.154,41.218) 24.195,41.259 27.834,41.259 U1.11
  Bottom Layer w0.6: U7.1 3.5,55.85 1.87,54.22 1.87,52.825 2.945,51.75 3,51.75 4.075,50.675 4.15,50.675 R10.1
PA6: R9.1 U1.12 U6.1 | length 56.6
  Top Layer w0.5: U6.1 3.5,66.446 4.42,67.366 4.42,67.428 5.492,68.5 8.774,68.5 12.8,64.474 12.8,55.682 12.834,55.648 12.834,47.511 16.302,44.043 23.294,44.043 25.204,42.133 25.204,41.131 24.5,40.427 v1(24.5,40.3)
  Bottom Layer w0.3: v1(24.5,40.3) 24.581,40.3 24.931,40.65 U1.12
  Bottom Layer w0.5: U6.1 1.92,64.46 1.92,62.846 2.98,61.785 3.125,61.785 4.2,60.71 R9.1
PA7: R8.1 U1.13 U5.1 | length 63.9
  Top Layer w0.5: U5.1 1.92,74.46 1.92,72.846 5.512,69.254 9.087,69.254 13.596,64.745 13.596,47.815 16.614,44.797 23.606,44.797 23.903,44.5 25.7,42.703 25.958,42.445 25.958,40.458 v1(25,39.5)
  Bottom Layer w0.3: v1(25,39.5) 25.061,39.5 25.561,40 U1.13
  Bottom Layer w0.5: U5.1 1.92,74.46 1.92,72.846 2.98,71.785 3.125,71.785 4.2,70.71 R8.1
PWM: Q1.1 R6.1 R7.2 U1.14 | length 23.9
  Top Layer w0.5: v1(19.198,51.628) 19.217,51.608 19.729,51.608 26.712,44.625 26.712,40.075 25.77,39.133 25.77,38.916 25.559,38.705 v1(25.559,38.678)
  Bottom Layer w0.3: v1(25.559,38.678) 26.231,39.35 U1.14
  Bottom Layer w0.6: v1(19.198,51.628) 19.2,51.628 19.376,51.451 19.528,51.603 20.122,51.603 20.173,51.653 R6.1 20.122,51.778 20.122,51.853 19.423,52.552 19.423,53.077 R7.2 ; Q1.1 19.647,50.042 19.848,50.242 19.884,50.242 20.09,50.448 R6.1@20.09,51.4
SCL: P1.5 R5.2 U1.17 | length 11.7
  Bottom Layer w0.3: U1.17 cw(c28.055,37.16) 27.965,37.446 ccw(c27.8,37.975) 27.994,37.456 cw(c28.099,37.175) 28.1,37.475 28.575,37.475 ccw(c28.575,37.825) 28.851,37.61 cw(c29.087,37.425) 29.089,37.725 29.825,37.725 ccw(c29.825,38.075) 30.175,38.075 30.175,38.41 cw(c30.475,38.41) 30.176,38.437 ccw(c29.475,38.5) 30.179,38.5 30.179,38.684 cw(c30.77,38.684) 30.77,39.275 30.801,39.275 ccw(c30.801,39.575) 31.097,39.53 ccw(c28.625,39.9) R5.2 31.125,39.975 30.925,40.175 30.921,40.175 29.445,41.651 29.445,44.355 29.904,44.814 30.024,44.814 30.35,45.14 P1.5@30.675,45.14
SDA: P1.6 R4.2 U1.18 | length 11.6
  Bottom Layer w0.3: U1.18 28.807,36.75 ccw(c28.807,37.05) 29.029,36.849 cw(c29.594,36.337) 30.355,36.337 30.355,36.258 ccw(c30.675,36.258) 30.675,35.938 31.075,35.938 ccw(c31.075,36.075) 31.213,36.075 31.213,38.412 R4.2 31.136,38.511 31.213,38.588 cw(c31.745,38.588) 31.28,38.846 31.563,39.13 cw(c31.715,38.871) 31.604,39.15 ccw(c31.475,39.475) 31.617,39.155 ccw(c31.475,39.475) 31.825,39.475 31.825,40.325 ccw(c31.475,40.325) 31.504,40.674 cw(c31.529,40.973) 31.229,40.973 31.229,41.07 ccw(c30.375,41.07) 31.152,41.424 cw(c31.425,41.549) 31.125,41.549 31.125,42.15 ccw(c30.675,42.15) P1.6@30.675,42.6
SWCLK: P1.3 U1.20 | length 19.7
  Top Layer w0.6: v1(29.566,35.459) 29.629,35.522 29.905,35.522 30.415,36.032 30.415,37.752 ; 29.674,41.243 30.411,40.507 30.411,40.102 cw(c29.811,40.102) 29.811,39.502 29.728,39.502 ccw(c29.728,39.075) 29.728,38.648 29.811,38.648 cw(c29.811,38.048) 30.411,38.048 30.411,37.748 ; 29.678,41.247 29.67,41.247 29.295,41.622 29.295,43.167 29.295,44.563 29.295,45.707 29.295,47.103 29.295,49.295 29.878,49.878 30.095,49.878 30.431,50.215 P1.3
  Bottom Layer w0.3: U1.20 27.934,35.509 29.516,35.509 v1(29.566,35.459)
SWDIO: P1.2 U1.19 | length 19.5
  Top Layer w0.6: v1(29.551,36.376) 29.551,37.407 28.441,38.517 28.441,50.521 P1.2
  Bottom Layer w0.3: U1.19 29.194,36.1 v1@29.386,36.292 ; v1@29.386,36.292 cw(c29.597,36.079) 29.531,36.371 v1(29.551,36.376)
U3_1IN-: Q2.3 RN1.6 U3.6 | length 25.6
  Bottom Layer w0.35: RN1.6 14.971,61.8 15.088,61.917 17.418,61.917 17.606,62.105 20.805,62.105 22.481,63.781 U3.6
  Bottom Layer w0.4: Q2.3 13.6,76 14.5,75.1 15.216,75.1 15.45,74.866 15.45,72.875 22.386,65.938 22.386,64.955 U3.6
U3_1OUT: Q2.1 U3.5 | length 11.9
  Bottom Layer w0.4: Q2.1 14.55,72.85 21.211,66.189 U3.5
U3_2IN-: Q3.3 RN1.5 U3.3 | length 14.2
  Bottom Layer w0.5: Q3.3 17.258,68.2 18.671,66.786 U3.3 18.546,64.735 18.546,64.006 17.137,62.596 15.77,62.596 15.766,62.6 RN1.5
U3_2OUT: Q3.1 U3.4 | length 7.7
  Bottom Layer w0.4: Q3.1 17.303,69.15 19.941,66.512 U3.4
U3_3IN-: Q5.3 RN1.7 U3.8 | length 36
  Top Layer w0.6: v1(16,54.5) 17.786,54.5 23.7,60.414 v1(23.7,60.8)
  Bottom Layer w0.4: Q5.3 13.65,42.741 12.992,43.399 12.992,50.354 16,53.362 v1(16,54.5) ; RN1.7 15.06,61 15.348,61.288 18.76,61.288 18.948,61.476 23.024,61.476 v1(23.7,60.8) 23.7,60.746 23.751,60.694 U3.8
U3_3OUT: Q5.1 U3.9 | length 27.2
  Top Layer w0.6: v1(16.6,55.6) 17.678,55.6 22.525,60.447 v1(22.525,60.722)
  Bottom Layer w0.4: Q5.1 14.65,39.75 14.65,42.666 13.646,43.67 13.646,50.083 16.754,53.191 16.754,55.392 16.6,55.546 v1(16.6,55.6) ; U3.9 22.481,60.624 22.525,60.668 v1(22.525,60.722)
U3_4IN-: Q4.3 RN1.8 U3.11 | length 15.1
  Bottom Layer w0.3: Q4.3 15.221,56 16.079,56.858 18.724,56.858 19.941,58.075 U3.11
  Bottom Layer w0.45: RN1.8 15.22,60.2 15.58,60.56 19.223,60.56 19.473,60.309 19.473,60.228 19.941,59.76 U3.11
U3_4OUT: Q4.1 U3.10 | length 10.1
  Bottom Layer w0.3: Q4.1 14.6,54 15.296,54.696 15.296,55.292 16.308,56.304 19.28,56.304 21.211,58.235 U3.10
U4_1IN-: Q6.3 RN2.6 U4.6 | length 29.7
  Bottom Layer w0.3: U4.6@22.341,20.6 U4.6
  Bottom Layer w0.4: Q6.3 13.6,36 14.451,35.149 15.167,35.149 15.453,34.862 15.453,33.147 17.1,31.5 17.1,26.134 19.735,23.5 20.492,23.5 22.341,21.651 U4.6@22.341,20.6
  Bottom Layer w0.45: RN2.6 15.24,19.65 15.615,19.275 21.985,19.275 22.248,19.539 22.248,20.508 U4.6@22.341,20.6
U4_1OUT: Q6.1 U4.5 | length 16.2
  Bottom Layer w0.4: Q6.1 14.799,33.751 14.799,32.876 16.446,31.229 16.446,25.863 16.5,25.809 16.5,25.8 20.615,21.685 20.702,21.685 20.936,21.451 20.936,20.735 U4.5
U4_2IN-: Q7.3 RN2.5 U4.3 | length 12
  Bottom Layer w0.45: Q7.3 13.575,26.175 13.575,22.84 14.1,22.315 ; RN2.5 14.1,22.315 ; U4.3 18.421,20.71 18.421,21.479 17.171,22.729 14.514,22.729 14.1,22.315
U4_2OUT: Q7.1 U4.4 | length 7.4
  Bottom Layer w0.4: Q7.1 14.55,23.8 14.85,23.5 15.05,23.5 15.142,23.408 17.967,23.408 19.666,21.709 19.666,20.735 U4.4
U4_3IN-: Q9.3 RN2.7 U4.8 | length 26.5
  Bottom Layer w0.3: RN2.7 15.151,18.85 15.397,18.604 17.982,18.604 17.986,18.6 21.8,18.6 23.651,16.748 U4.8
  Bottom Layer w0.5: Q9.3 15.286,9.45 16.274,10.438 20.156,10.438 23.526,13.808 23.526,14.985 U4.8
U4_3OUT: Q9.1 U4.9 | length 10.8
  Bottom Layer w0.4: Q9.1 14.7,10.7 15.541,10.7 15.983,11.142 19.861,11.142 22.381,13.662 U4.9
U4_4IN-: Q8.3 RN2.8 U4.11 | length 19.5
  Bottom Layer w0.3: RN2.8 17.753,18.05 17.757,18.046 18.154,18.046 19.841,16.359 U4.11
  Bottom Layer w0.35: Q8.3 14.921,15.925 15.231,15.615 15.231,12.764 15.25,12.745 15.47,12.525 18.23,12.525 18.276,12.57 19.312,12.57 19.841,13.1 19.841,13.431
  Bottom Layer w0.5: 19.841,13.431 U4.11
U4_4OUT: Q8.1 U4.10 | length 10.5
  Bottom Layer w0.5: Q8.1 14.55,13.475 14.55,12.484 15.188,11.846 19.548,11.846 21.111,13.409 U4.10
V_REF: U2.1 U2.4 U3.1 U3.2 U3.12 U3.13 U4.1 U4.2 U4.12 U4.13 | length 70.7
  Top Layer w0.7: v1(15.2,50.5) 15.096,50.604 15.096,55.374 16.434,56.712 17.512,56.712 v1(18.85,58.05) 18.85,61.3 v1(16.75,63.4) ; v1(16.6,21.9) 13.708,24.792 13.708,34.808 v1(16.6,37.7)
  Top Layer w0.8: v1(16.6,21.9) 16.6,18.87 18,17.47 v1(18,16.6)
  Bottom Layer w0.55: U2.1@16.315,43.786 U2.1 16.428,43.824 17.351,43.824 17.564,44.036
  Bottom Layer w0.6: 17.564,44.036 18.703,45.176 18.703,45.599 18.753,45.649 U2.4
  Bottom Layer w0.7: v1(15.2,50.5) 15.339,50.361 15.339,44.135 15.675,43.799 15.998,43.799 16.048,43.749 U2.1 ; U4.1 16.057,20.585 16.057,21.431 16.525,21.9 v1(16.6,21.9) 16.808,21.9 17.276,21.431 17.276,20.585 U4.2 ; U3.1 16.156,64.835 16.156,64.02 16.722,63.454 16.787,63.454 17.376,64.043 17.376,64.835 U3.2 ; U2.1@16.536,43.749 16.536,39.064 16.6,39 v1(16.6,37.7) ; U4.13 17.326,15.135 17.326,16.19 17.737,16.6 v1(18,16.6) 18.136,16.6 18.547,16.19 18.547,15.135 U4.12 ; U3.13 U3.12 18.696,59.385 18.696,58.456 18.85,58.303 v1(18.85,58.05)
VCC_3V3: C4.1 C6.1 C7.1 C8.1 DA1.5 L2.1 | length 11.3
  Bottom Layer w0.3: L2.1@22.001,46.18 22.001,47.696 22.955,48.65 23.125,48.65 23.6,49.125 C4.1
  Bottom Layer w0.7: L2.1 21.416,45.839 22.001,45.839 23.164,45.839 C8.1 C7.1 C6.1 ; C4.1 23.762,49.637 25.7,49.637 DA1.5
VCC_5V_IN: D1.2 P1.1 | length 3.3
  Bottom Layer w1: P1.1 31.175,55.795 D1.2
VDD: C9.1 C10.1 C11.1 C12.1 L2.2 L3.1 R4.1 R5.1 U1.16 | length 22.9
  Bottom Layer w0.2: U1.16 28,38.175 28.7,38.175 28.754,38.229 29.225,38.229 29.475,38.479 R4.1
  Bottom Layer w0.25: 28.691,42.075 28.691,41.869 28.9,41.66 28.9,41.129 29.075,40.954
  Bottom Layer w0.4: L3.1 19.124,42.054 27.2,42.054 27.422,42.276 27.422,42.675 27.622,42.875 C12.1
  Bottom Layer w0.6: 29.075,40.954 29.425,40.604 29.425,39.95 R5.1 R4.1
  Bottom Layer w0.7: L2.2 21.47,42.925 23.15,42.925 C9.1 C10.1 C11.1 C12.1@27.622,42.875 ; C12.1 27.747,42.825 28.104,42.825 28.691,42.238 28.691,42.075
pads on no net: U5.5 U5.6 U5.7 U6.5 U6.6 U6.7 U7.5 U7.6 U7.7 U8.5 U8.6 U8.7 U9.5 U9.6 U9.7 U10.5 U10.6 U10.7 U11.5 U11.6 U11.7 U12.5 U12.6 U12.7
copper on no net: | length 1.7
  Top Layer w0.6: 23.746,54.1 24.6,54.1 ; 26.574,38.646 26.587,37.787
  other v2: 28.2,17.5 28.2,62.5

## Polygon pours and split planes (outlines as drawn)
AGND on Bottom Layer "AGND_L02_P014" (solid, pour order 14): 13.959,79.624 1.966,79.624 ccw(c1.966,77.617) -0.041,77.617 -0.041,1.524 ccw(c1.459,1.524) 1.459,0.024 10.859,0.024 19.459,8.624 26.959,8.624 32.959,14.624 32.959,65.624 27.459,71.124 22.459,71.124
GND on Bottom Layer "GND_L02_P011" (solid, pour order 11): 31.9,55.7 31.9,21.7 19.175,21.7 19.175,31.375 20,32.2 20,41.85 20.35,42.2 23.5,42.2 23.5,44.725 23.975,45.2 28.2,45.2 28.2,55 28.9,55.7
GND on Bottom Layer "GND_L02_P002" (solid, pour order 2): 28.825,34.825 21.025,34.825 21.025,27.7 28.825,27.7
AGND on Top Layer "AGND_L01_P019" (solid, pour order 19): 1.5,0 cw(c1.5,1.5) 0,1.5 0,77.593 cw(c2.007,77.593) 2.007,79.6 14,79.6 22.5,71.1 27.5,71.1 33,65.6 33,14.6 27,8.6 19.5,8.6 10.9,0
GND on Top Layer "GND_L01_P018" (solid, pour order 18): 31.9,55.7 31.9,21.7 19.175,21.7 19.175,31.375 20,32.2 20,41.85 20.35,42.2 23.5,42.2 23.5,44.725 23.975,45.2 28.2,45.2 28.2,55 28.9,55.7
GND on Top Layer "GND_L01_P004" (solid, pour order 4): 28.825,34.825 21.025,34.825 21.025,27.7 28.825,27.7

## Keep-outs
Keep-Out Layer:
  the board outline again, w0.2

## Silkscreen, mask and mechanical layers (free items; w line width, h text height)
Top Overlay:
  lines w0.2: 29.4,46.5 31.9,46.5
  text "Rev:1" at 21.367,58.075 h4 r90
  text "5V" at 24.73,54.51 h3
  text "sensor array" at 18.36,53.377 h2.5 r90
  text "Linelance" at 16.818,53.331 h6 r90
  text "SWDIO" at 21.108,51.995 h3
  text "SWCLK" at 21.061,49.455 h3
  text "GND" at 23.657,46.915 h3
  text "SCL" at 24.85,44.375 h3
  text "SDA" at 24.148,41.835 h3
  text "vladubase@gmail.com" at 14.24,17.278 h3 r90
  text "by Uladzislau Dubatouka" at 17.044,17.278 h3 r90
  text "designed in Belarus" at 20.132,17.275 h2.5 r90
Bottom Overlay:
  lines w0.16: 14.775,16.425 15.5,15.35 ; 21.025,38.375 21.65,38.375 ; 28.2,38.375 28.825,38.375
  lines w0.2: 20.5,13.75 20.5,14.5 ; 20.6,58.05 20.6,58.8 ; 21.75,21.25 21.75,22 ; 21.85,65.55 21.85,66.3 ; 23.1,50.662 23.1,50.737 ; 24.1,50.662 24.1,50.737 ; 27.1,55.62 27.1,55.695 ; 28.1,55.62 28.1,55.695 ; 31.95,46.5 29.405,46.5 ; 29.405,46.5 29.4,56.575 31.95,56.575 31.945,46.5 31.95,41.325 29.4,41.325 29.405,46.5
  text "7" at 24.94,64.385 h0.8
  text "14" at 15.465,59.035 h0.8
  text "10" at 20.284,41.236 h0.8 r270
  text "20" at 28.21,33.66 h0.8 r270
  text "7" at 24.765,21.035 h0.8
  text "14" at 14.99,16.71 h0.8